# Allegro board ATMEGA.brd
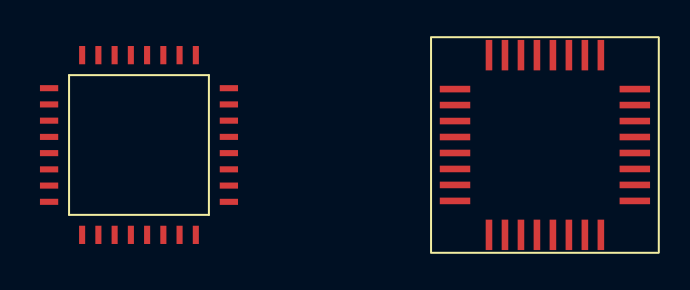
[diagram p0: board, top side]
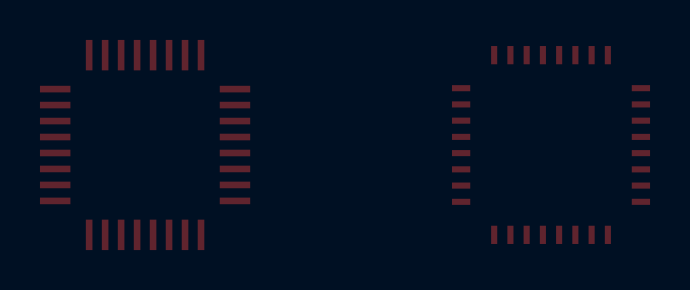
[diagram p1: board, bottom side, seen from below]

No outline. copper layers: TOP, BOTTOM. Coordinates in mm from the lowest, leftmost part position.

## Placement (name value [footprint] x y rotation side)
IC1  ATmega168-TQ32  [ATMEGA328]  0 0 0 top
IC2  ATmega168-TQ32  [TQFP32]  20.32 0 0 top

## Library data of the parts
IC1 IC2 = ATmega168-TQ32_0

## Footprints (pads in the part's own frame, mm; a bottom-side part is the same pattern mirrored in y, then rotated)
ATMEGA328
  rect 0.914x0.305 smd: 1(-4.5,2.846) 2(-4.5,2.032) 3(-4.5,1.219) 4(-4.5,0.406) 5(-4.5,-0.407) 6(-4.5,-1.22) 7(-4.5,-2.032) 8(-4.5,-2.845) 17(4.5,-2.846) 18(4.5,-2.032) 19(4.5,-1.219) 20(4.5,-0.406) 21(4.5,0.407) 22(4.5,1.22) 23(4.5,2.032) 24(4.5,2.845)
  rect 0.305x0.914 smd: 9(-2.846,-4.5) 10(-2.032,-4.5) 11(-1.219,-4.5) 12(-0.406,-4.5) 13(0.407,-4.5) 14(1.22,-4.5) 15(2.032,-4.5) 16(2.845,-4.5) 25(2.846,4.5) 26(2.032,4.5) 27(1.219,4.5) 28(0.406,4.5) 29(-0.407,4.5) 30(-1.22,4.5) 31(-2.032,4.5) 32(-2.845,4.5)
TQFP32
  rect 1.524x0.33 smd: 1(-4.5,2.8) 2(-4.5,2) 3(-4.5,1.2) 4(-4.5,0.4) 5(-4.5,-0.4) 6(-4.5,-1.2) 7(-4.5,-2) 8(-4.5,-2.8) 17(4.5,-2.8) 18(4.5,-2) 19(4.5,-1.2) 20(4.5,-0.4) 21(4.5,0.4) 22(4.5,1.2) 23(4.5,2) 24(4.5,2.8)
  rect 0.33x1.524 smd: 9(-2.8,-4.5) 10(-2,-4.5) 11(-1.2,-4.5) 12(-0.4,-4.5) 13(0.4,-4.5) 14(1.2,-4.5) 15(2,-4.5) 16(2.8,-4.5) 25(2.8,4.5) 26(2,4.5) 27(1.2,4.5) 28(0.4,4.5) 29(-0.4,4.5) 30(-1.2,4.5) 31(-2,4.5) 32(-2.8,4.5)

## Nets
GND: IC1.4(GND#4) IC1.6(GND#6)
VCC: IC1.3(VCC#3) IC1.5(VCC#5)
N01925: IC1.24(PC1) IC2.1(PD3)
N01927: IC1.23(PC0) IC2.2(PD4)
N01929: IC1.22(ADC7) IC2.3(VCC#3)
N01931: IC1.21(AGND) IC2.4(GND#4)
N01933: IC1.18(AVCC) IC2.7(PB6)
N01935: IC1.17(PB5) IC2.8(PB7)
N01937: IC1.19(ADC6) IC2.6(GND#6)
N01939: IC1.20(AREF) IC2.5(VCC#5)

Pads without a net: IC1 1 2 7 8 9 10 11 12 13 14 15 16 25 26 27 28 29 30 31 32; IC2 9 10 11 12 13 14 15 16 17 18 19 20 21 22 23 24 25 26 27 28 29 30 31 32
